# Altium PCB BugBuster_DAQ.PcbDoc (part 3 of 5)
Units mm, origin at the board's own origin, x right, y up, seen from the top; angles counter-clockwise.
Board outline 110 x 80 mm, 6 copper layers (Top Layer, Inner Layer 1, Inner Layer 2, Inner Layer 3, Inner Layer 4, Bottom Layer), stack 1.202 mm thick; 245 components, 205 nets, 1250 pads, 1565 vias.
Unrouted connection lines stored in the file: 8.
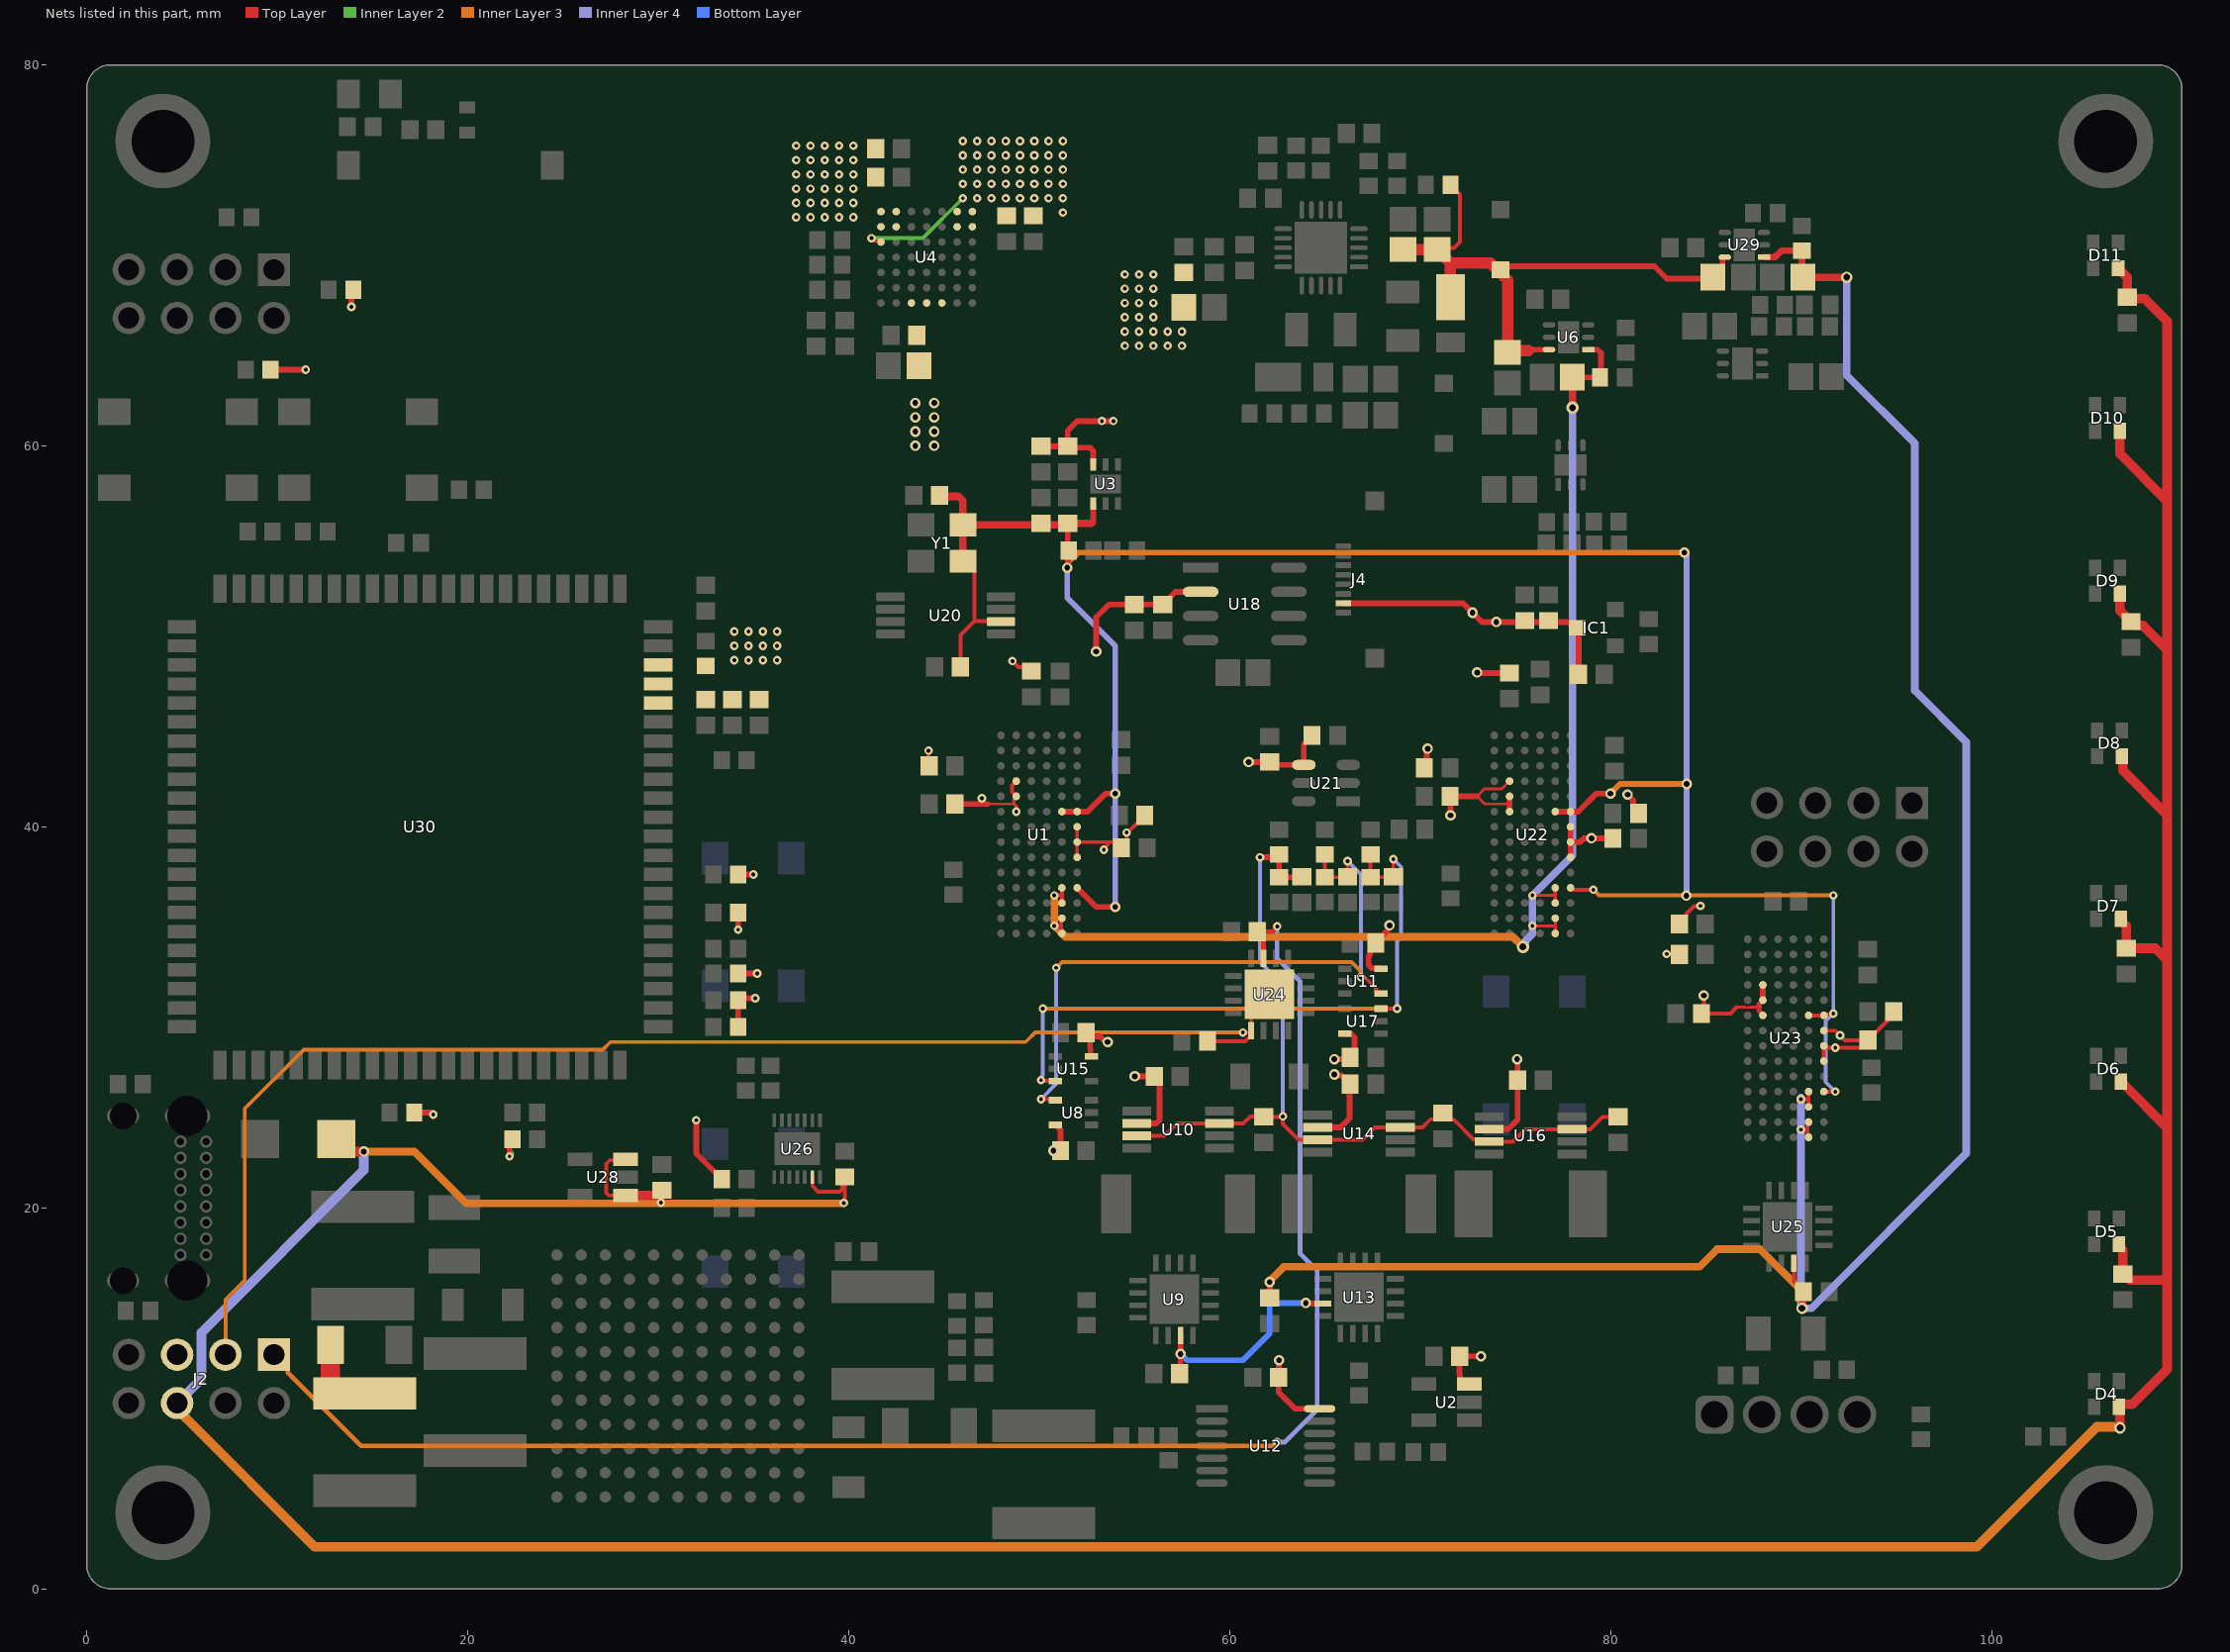
[diagram p6: the nets of this part, all layers, seen from the top]

## Part data (continued)
R52: library part ERJ-3EKF1913V, "RES SMD 191K OHM 1% 1/10W 0603", Device Package="0603 (1608 Metric)", manufacturer="Panasonic Electronic Components", Operating Temperature="-55Â°C ~ 155Â°C", Power (Watts)="0.1W 1/10W", Ratings=AEC-Q200, Supplier Device Package=0603, Supplier Part Number 1=P191KHCT-ND, Temperature Coefficient=Â±100ppm/Â°C, Tolerance=Â±1%, componentlink1description=Datasheet, componentlink1url=https://industrial.panasonic.com/cdbs/www-data/pdf/RDA0000/AOA0000C304.pdf, componentlink2description="DigiKey Link", componentlink2url=https://www.digikey.com/en/products/detail/panasonic-electronic-components/ERJ-3EKF1913V/196180, Composition="Thick Film", Features="Automotive AEC-Q200", Height - Seated (Max)="0.022\ (0.55mm)", lastupdated="2024-02-09 20:42:13.417000", Lifecycle Status=Active, Minimum Order=1, Number of Terminations=2, Package / Case="0603 (1608 Metric)", packaging=TapeAndReel, Part Number=ERJ-3EKF1913V, Part Status=Active, partid=24201, price=0.01, Resistance="191 kOhms", series=ERJ-3EK, Size / Dimension="0.063\ L x 0.031\ W (1.60mm x 0.80mm)", Supplier 1=DigiKey
R53: library part ERJ-8BWFR020V, "RES 0.02 OHM 1% 1W 1206", Device Package="1206 (3216 Metric)", manufacturer="Panasonic Electronic Components", Operating Temperature="-55°C ~ 155°C", Power (Watts)=1W, Ratings=AEC-Q200, Supplier Device Package=1206, Supplier Part Number 1=P.020AUCT-ND, Temperature Coefficient="0/ +150ppm/°C", Tolerance=±1%, componentlink1description=Datasheet, componentlink1url=https://industrial.panasonic.com/cdbs/www-data/pdf/RDN0000/AOA0000C313.pdf, componentlink2description="DigiKey Link", componentlink2url=https://www.digikey.com/en/products/detail/panasonic-electronic-components/ERJ-8BWFR020V/1711639, Composition="Thick Film", Features="Automotive AEC-Q200, Current Sense", Height - Seated (Max)="0.030\" (0.75mm)", lastupdated="05/04/2026 20:25:39", Lifecycle Status=Active, Minimum Order=1, Number of Terminations=2, Package / Case="1206 (3216 Metric)", packaging=TapeAndReel, Part Number=ERJ-8BWFR020V, Part Status=Active, partid=2547, price=0.18, Resistance="20 mOhms", series=ERJ-8BW, Size / Dimension="0.126\" L x 0.063\" W (3.20mm x 1.60mm)", Supplier 1=DigiKey
R55: library part ERJ-D2DFR022V, "RES 0.022 OHM 1W 1206 WIDE", Device Package="1206 (3216 Metric)", manufacturer="Panasonic Electronic Components", Operating Temperature="-55°C ~ 155°C", Power (Watts)=1W, Ratings=AEC-Q200, Supplier Device Package=0612, Supplier Part Number 1=P124357CT-ND, Temperature Coefficient=±100ppm/°C, Tolerance=±1%, componentlink1description=Datasheet, componentlink1url=https://industrial.panasonic.com/cdbs/www-data/pdf/RDN0000/RDN0000C331.pdf, componentlink2description="DigiKey Link", componentlink2url=https://www.digikey.com/en/products/detail/panasonic-electronic-components/ERJ-D2DFR022V/9948175, Composition="Thick Film", Features="Automotive AEC-Q200, Current Sense", Height - Seated (Max)="0.031\" (0.80mm)", lastupdated="05/04/2026 20:25:34", Lifecycle Status=Active, Minimum Order=1, Number of Terminations=2, Package / Case="1206 (3216 Metric)", packaging=TapeAndReel, Part Number=ERJ-D2DFR022V, Part Status=Active, partid=2866, price=0.15, Resistance="22 mOhms", series=ERJ-D2, Size / Dimension="0.063\" L x 0.126\" W (1.60mm x 3.20mm)", Supplier 1=DigiKey
R56: library part ERJ-3EKF9092V, "RES SMD 90.9K OHM 1% 1/10W 0603", Device Package="0603 (1608 Metric)", manufacturer="Panasonic Electronic Components", Operating Temperature="-55°C ~ 155°C", Power (Watts)="0.1W 1/10W", Ratings=AEC-Q200, Supplier Device Package=0603, Supplier Part Number 1=P90.9KHCT-ND, Temperature Coefficient=±100ppm/°C, Tolerance=±1%, componentlink1description=Datasheet, componentlink1url=https://industrial.panasonic.com/cdbs/www-data/pdf/RDA0000/AOA0000C304.pdf, componentlink2description="DigiKey Link", componentlink2url=https://www.digikey.com/en/products/detail/panasonic-electronic-components/ERJ-3EKF9092V/196512, Composition="Thick Film", Features="Automotive AEC-Q200", Height - Seated (Max)="0.022\ (0.55mm)", lastupdated="2024-02-09 20:42:22.497000", Lifecycle Status=Active, Minimum Order=1, Number of Terminations=2, Package / Case="0603 (1608 Metric)", packaging=TapeAndReel, Part Number=ERJ-3EKF9092V, Part Status=Active, partid=23128, price=0.01, Resistance="90.9 kOhms", series=ERJ-3EK, Size / Dimension="0.063\ L x 0.031\ W (1.60mm x 0.80mm)", Supplier 1=DigiKey
R57: library part ERJ-3EKF1132V, "RES SMD 11.3K OHM 1% 1/10W 0603", Device Package="0603 (1608 Metric)", manufacturer="Panasonic Electronic Components", Operating Temperature="-55°C ~ 155°C", Power (Watts)="0.1W 1/10W", Ratings=AEC-Q200, Supplier Device Package=0603, Supplier Part Number 1=P11.3KHCT-ND, Temperature Coefficient=±100ppm/°C, Tolerance=±1%, componentlink1description=Datasheet, componentlink1url=https://industrial.panasonic.com/cdbs/www-data/pdf/RDA0000/AOA0000C304.pdf, componentlink2description="DigiKey Link", componentlink2url=https://www.digikey.com/en/products/detail/panasonic-electronic-components/ERJ-3EKF1132V/196085, Composition="Thick Film", Features="Automotive AEC-Q200", Height - Seated (Max)="0.022\ (0.55mm)", lastupdated="2024-02-09 20:41:56.867000", Lifecycle Status=Active, Minimum Order=1, Number of Terminations=2, Package / Case="0603 (1608 Metric)", packaging=TapeAndReel, Part Number=ERJ-3EKF1132V, Part Status=Active, partid=26019, price=0.01, Resistance="11.3 kOhms", series=ERJ-3EK, Size / Dimension="0.063\ L x 0.031\ W (1.60mm x 0.80mm)", Supplier 1=DigiKey
R58: library part ERJ-3EKF1782V, "RES SMD 17.8K OHM 1% 1/10W 0603", Device Package="0603 (1608 Metric)", manufacturer="Panasonic Electronic Components", Operating Temperature="-55°C ~ 155°C", Power (Watts)="0.1W 1/10W", Ratings=AEC-Q200, Supplier Device Package=0603, Supplier Part Number 1=P17.8KHCT-ND, Temperature Coefficient=±100ppm/°C, Tolerance=±1%, componentlink1description=Datasheet, componentlink1url=https://industrial.panasonic.com/cdbs/www-data/pdf/RDA0000/AOA0000C304.pdf, componentlink2description="DigiKey Link", componentlink2url=https://www.digikey.com/en/products/detail/panasonic-electronic-components/ERJ-3EKF1782V/196161, Composition="Thick Film", Features="Automotive AEC-Q200", Height - Seated (Max)="0.022\ (0.55mm)", lastupdated="2024-02-09 20:42:07.707000", Lifecycle Status=Active, Minimum Order=1, Number of Terminations=2, Package / Case="0603 (1608 Metric)", packaging=TapeAndReel, Part Number=ERJ-3EKF1782V, Part Status=Active, partid=24838, price=0.01, Resistance="17.8 kOhms", series=ERJ-3EK, Size / Dimension="0.063\ L x 0.031\ W (1.60mm x 0.80mm)", Supplier 1=DigiKey
R59: library part ERJ-3EKF1022V, "RES SMD 10.2K OHM 1% 1/10W 0603", Device Package="0603 (1608 Metric)", manufacturer="Panasonic Electronic Components", Operating Temperature="-55°C ~ 155°C", Power (Watts)="0.1W 1/10W", Ratings=AEC-Q200, Supplier Device Package=0603, Supplier Part Number 1=P10.2KHCT-ND, Temperature Coefficient=±100ppm/°C, Tolerance=±1%, componentlink1description=Datasheet, componentlink1url=https://industrial.panasonic.com/cdbs/www-data/pdf/RDA0000/AOA0000C304.pdf, componentlink2description="DigiKey Link", componentlink2url=https://www.digikey.com/en/products/detail/panasonic-electronic-components/ERJ-3EKF1022V/196068, Composition="Thick Film", Features="Automotive AEC-Q200", Height - Seated (Max)="0.022\ (0.55mm)", lastupdated="2024-02-09 20:41:56.830000", Lifecycle Status=Active, Minimum Order=1, Number of Terminations=2, Package / Case="0603 (1608 Metric)", packaging=TapeAndReel, Part Number=ERJ-3EKF1022V, Part Status=Active, partid=26026, price=0.01, Resistance="10.2 kOhms", series=ERJ-3EK, Size / Dimension="0.063\ L x 0.031\ W (1.60mm x 0.80mm)", Supplier 1=DigiKey
R60: library part ERJ-3EKF1053V, "RES SMD 105K OHM 1% 1/10W 0603", Device Package="0603 (1608 Metric)", manufacturer="Panasonic Electronic Components", Operating Temperature="-55°C ~ 155°C", Power (Watts)="0.1W 1/10W", Ratings=AEC-Q200, Supplier Device Package=0603, Supplier Part Number 1=P105KHCT-ND, Temperature Coefficient=±100ppm/°C, Tolerance=±1%, componentlink1description=Datasheet, componentlink1url=https://industrial.panasonic.com/cdbs/www-data/pdf/RDA0000/AOA0000C304.pdf, componentlink2description="DigiKey Link", componentlink2url=https://www.digikey.com/en/products/detail/panasonic-electronic-components/ERJ-3EKF1053V/196079, Composition="Thick Film", Features="Automotive AEC-Q200", Height - Seated (Max)="0.022\ (0.55mm)", lastupdated="2024-02-09 20:42:07.593000", Lifecycle Status=Active, Minimum Order=1, Number of Terminations=2, Package / Case="0603 (1608 Metric)", packaging=TapeAndReel, Part Number=ERJ-3EKF1053V, Part Status=Active, partid=24851, price=0.01, Resistance="105 kOhms", series=ERJ-3EK, Size / Dimension="0.063\ L x 0.031\ W (1.60mm x 0.80mm)", Supplier 1=DigiKey
R61 R64: library part ERJ-PA3F5101V, "RES SMD 5.1K OHM 1% 1/3W 0603", Device Package="0603 (1608 Metric)", manufacturer="Panasonic Electronic Components", Operating Temperature="-55°C ~ 155°C", Power (Watts)="0.333W 1/3W", Ratings=AEC-Q200, Supplier Device Package=0603, Supplier Part Number 1=P5.1KBYCT-ND, Temperature Coefficient=±100ppm/°C, Tolerance=±1%, componentlink1description=Datasheet, componentlink1url=https://industrial.panasonic.com/cdbs/www-data/pdf/RDO0000/AOA0000C331.pdf, componentlink2description="DigiKey Link", componentlink2url=https://www.digikey.com/en/products/detail/panasonic-electronic-components/ERJ-PA3F5101V/5035934, Composition="Thick Film", Features="Automotive AEC-Q200 Pulse Withstanding", Height - Seated (Max)="0.022\ (0.55mm)", lastupdated="2024-02-09 20:42:57.823000", Lifecycle Status=Active, Minimum Order=1, Number of Terminations=2, Package / Case="0603 (1608 Metric)", packaging=TapeAndReel, Part Number=ERJ-PA3F5101V, Part Status=Active, partid=14704, price=0.01, Resistance="5.1 kOhms", series=ERJ-PA3, Size / Dimension="0.063\ L x 0.031\ W (1.60mm x 0.80mm)", Supplier 1=DigiKey
R71 R72 R75: library part ERJ-PA3F1000V, "RES SMD 100 OHM 1% 1/3W 0603", Device Package="0603 (1608 Metric)", manufacturer="Panasonic Electronic Components", Operating Temperature="-55°C ~ 155°C", Power (Watts)="0.333W 1/3W", Ratings=AEC-Q200, Supplier Device Package=0603, Supplier Part Number 1=P100BYCT-ND, Temperature Coefficient=±100ppm/°C, Tolerance=±1%, componentlink1description=Datasheet, componentlink1url=https://industrial.panasonic.com/cdbs/www-data/pdf/RDO0000/AOA0000C331.pdf, componentlink2description="DigiKey Link", componentlink2url=https://www.digikey.com/en/products/detail/panasonic-electronic-components/ERJ-PA3F1000V/5035847, Composition="Thick Film", Features="Automotive AEC-Q200 Pulse Withstanding", Height - Seated (Max)="0.022\ (0.55mm)", lastupdated="2024-02-09 20:42:52.130000", Lifecycle Status=Active, Minimum Order=1, Number of Terminations=2, Package / Case="0603 (1608 Metric)", packaging=TapeAndReel, Part Number=ERJ-PA3F1000V, Part Status=Active, partid=16197, price=0.01, Resistance="100 Ohms", series=ERJ-PA3, Size / Dimension="0.063\ L x 0.031\ W (1.60mm x 0.80mm)", Supplier 1=DigiKey
R77: library part ERJ-3EKF2433V, "RES SMD 243K OHM 1% 1/10W 0603", Device Package="0603 (1608 Metric)", manufacturer="Panasonic Electronic Components", Operating Temperature="-55°C ~ 155°C", Power (Watts)="0.1W 1/10W", Ratings=AEC-Q200, Supplier Device Package=0603, Supplier Part Number 1=P243KHCT-ND, Temperature Coefficient=±100ppm/°C, Tolerance=±1%, componentlink1description=Datasheet, componentlink1url=https://industrial.panasonic.com/cdbs/www-data/pdf/RDA0000/AOA0000C304.pdf, componentlink2description="DigiKey Link", componentlink2url=https://www.digikey.com/en/products/detail/panasonic-electronic-components/ERJ-3EKF2433V/196238, Composition="Thick Film", Features="Automotive AEC-Q200", Height - Seated (Max)="0.022\ (0.55mm)", lastupdated="2024-02-09 20:41:56.083000", Lifecycle Status=Active, Minimum Order=1, Number of Terminations=2, Package / Case="0603 (1608 Metric)", packaging=TapeAndReel, Part Number=ERJ-3EKF2433V, Part Status=Active, partid=26112, price=0.01, Resistance="243 kOhms", series=ERJ-3EK, Size / Dimension="0.063\ L x 0.031\ W (1.60mm x 0.80mm)", Supplier 1=DigiKey
U1 U22 U23: "High Input Impedance, Programmable Gain, 24-Bit, 1MSPS, Alias-Free Î¼ModuleÂ® DAQ Solution", Manufacturer_Name="Analog Devices Inc", Copyright="Copyright (C) 2026 Ultra Librarian. All rights reserved.", Manufacturer_Part_Number=ADAQ7769-1BBCZ, RefDes=RefDes, Type=Type
U2 U28: "+/-0.5 degrees C Accurate, 10-Bit Digital Temperature Sensor, 2.7 to 5.5 V Supply, Industrial, 5-pin SOT23 (RJ-5), Reel", manufacturer="Analog Devices", Supply Voltage Range="2.7 to 5.5 V", Code_JEDEC=MO-178-AA, componentlink1description="Manufacturer URL", componentlink1url=http://www.analog.com/en/index.html, componentlink2description=Datasheet, componentlink2url=http://www.analog.com/static/imported-files/data_sheets/AD7414_7415.pdf, ComponentLink3Description="Package Specification", ComponentLink3URL=http://www.analog.com/static/imported-files/packages/PKG_PDF/SOT-23(RJ)/RJ_5.pdf, ComponentLink4Description="Product URL", ComponentLink4URL=http://www.analog.com/en/mems-sensors/digital-temperature-sensors/ad7415/products/product.html, DatasheetVersion="Rev. F", Mounting Technology="Surface Mount", PackageDescription="5-Pin Small Outline Transistor Package, Body 2.9 x 1.6 mm, Pitch 0.95 mm", PackageReference=RJ-5, PackageVersion="121608-A , 12/2008", Packing=Reel, PartNumber=AD7415ARTZ-0500RL7
U3: "1-A, low-IQ, high-accuracy, adjustable ultra-low-dropout voltage regulator with power good & enable", Package="WSON-6 Texas Instruments", Check_prices=https://www.snapeda.com/parts/TPS74601PDRVT/Texas+Instruments/view-part/?ref=eda, MF="Texas Instruments", MP=TPS74601PDRVT, SnapEDA_Link=https://www.snapeda.com/parts/TPS74601PDRVT/Texas+Instruments/view-part/?ref=snap
U4: library part CMP-09139-000054-1, "DUAL 40VIN, 3A SILENT SWITCR UMO"
U5: library part CMP-09139-000215-1, "IC REG BST SEPIC ADJ DL 20LFCSP", Current - Output 1=2A, Current - Output 2=1.2A, Max Input Voltage=15V, Max Operating Temperature=125°C, Max Output Voltage=39V, Min Input Voltage=2.85V, Min Operating Temperature=-40°C, Min Output Voltage=1.6V, Switching Frequency=2.4MHz, Voltage - Output 2=-39V, Contact Plating=Tin, Lead Free="Contains Lead", Mount="Surface Mount", Number Of Outputs=2, Number of Pins=20, Operating Supply Voltage=15V, Output Current=2A, Output Type=Adjustable, packaging=Tray, REACH SVHC="No SVHC", RoHS Compliant=Yes, Synchronous Rectifier=No, Topology=Boost, Voltage - Output 1=39V
U6 U29: library part CMP-09138-000083-1, "IC REG LIN POS ADJ 200MA 6LFCSP", Dropout Voltage=200mV, Input Bias Current=1uA, Max Input Voltage=40V, Max Operating Temperature=125°C, Max Output Current=200mA, Min Current Limit=250mA, Min Input Voltage=2.7V, Min Operating Temperature=-40°C, Operating Supply Current=180uA, Output Voltage=39.8V, Package Quantity=3000, Power Supply Rejection Ratio (PSRR)=50dB, Quiescent Current=140uA, Accuracy=0.8%, Contact Plating=Gold, Lead Free="Contains Lead", Mount="Surface Mount", Number Of Outputs=1, Number of Pins=6, Number of Regulators=1, Output Current=200mA, Output Type=Adjustable, packaging="Tape and Reel", Polarity=Positive, RoHS Compliant=Yes
U7 U31: library part CMP-09138-000111-1, "IC REG LIN NEG ADJ 200MA 6LFCSP", Dropout Voltage=185mV, Max Input Voltage=-28V, Max Operating Temperature=125°C, Max Output Current=-200mA, Max Output Voltage=-25.3V, Max Supply Current=-650uA, Min Current Limit=230mA, Min Input Voltage=-2.7V, Min Operating Temperature=-40°C, Output Current=200mA, Output Voltage=27.8V, Power Supply Rejection Ratio (PSRR)=45dB, Quiescent Current=-850uA, Accuracy=1%, Contact Plating=Gold, Lead Free="Contains Lead", Min Output Voltage=-2.7V, Mount="Surface Mount", Number Of Outputs=1, Number of Pins=6, Number of Regulators=1, Output Type=Adjustable, packaging="Tape and Reel", Polarity=Negative, RoHS Compliant=Yes
U8 U11 U15 U17: "Rail-to-Rail, Very Fast, 2.5 V to 5.5 V, Single-Supply TTL/CMOS Comparator in 5-lead SC70 and SOT-23 Packages", Manufacturer_Name="Analog Devices Inc", Copyright="Copyright (C) 2026 Ultra Librarian. All rights reserved.", Datasheet=https://www.analog.com/media/en/technical-documentation/data-sheets/ADCMP600_601_602.pdf, Manufacturer_Part_Number=ADCMP600BKSZ-R2, RefDes=RefDes, Type=Type
U9 U13: "0.5 mR RON, ±20 V, +36 V, Quad SPST Switch", Manufacturer_Name="Analog Devices Inc", Copyright="Copyright (C) 2026 Ultra Librarian. All rights reserved.", Manufacturer_Part_Number=ADG6412BCPZ-REEL7, RefDes=RefDes, Type=Interface
U10 U14 U16: "2 V to 70 V Wide Input Voltage Range, 2.7 MHz High Bandwidth, Current-Sense Amplifier with PWM Rejection and Gain 50 V/V", Manufacturer_Name="Analog Devices Inc", Copyright="Copyright (C) 2026 Ultra Librarian. All rights reserved.", Manufacturer_Part_Number=AD8411AWBRMZ, RefDes=RefDes, Type=Linear
U12: library part CMP-04903-000067-1, "IC GATE NOR 4CH 2-INP 14TSSOP"
U18: library part CMP-09137-000153-1, "IC VREF SERIES 0.02% 8SOIC", Case/Package=SOIC, Max Operating Temperature=70°C, Min Operating Temperature=0°C, Min Output Voltage=4.096V, Operating Supply Current=950uA, Output Current=10mA, Temperature Coefficient=1ppm/°C, Tolerance=0.02%, Mount="Surface Mount", Output Type=Fixed, Reference Type=Series, RoHS Compliant=Yes, series=-
U20: library part CMP-04855-000004-1, "IC CLK BUFFER 1:4 250MHZ 8TSSOP", Ambient Temperature Range High=+85°C, Ambient Temperature Range Low=-40°C, manufacturer="Texas Instruments", Max Junction Temp=+125°C, Max Supply Voltage=3.6V, Min Supply Voltage=2.3V, Nominal Supply Current=3-6mA, Package=PW0008A, Temperature="-40°C to +85°C", Automotive=No, Category=IC, componentlink2description=Datasheet, componentlink2url=http://www.ti.com/lit/ds/symlink/cdclvc1104.pdf, Device Class L1="Integrated Circuits (ICs)", Device Class L2="Clock and Timing", Device Class L3="Clock Buffers", Digikey Description="IC CLK BUFFER 1:4 250MHZ 8TSSOP", Height=1.2mm, Lead Free=Yes, Logic Function=Non-Inverting, Manufacturer Part Number=CDCLVC1104PWR, Mouser Description="Clock Buffer Lo Jitter,1:4 LVCMOS Fan-out Clock Buffer", Number of Elements=1, Number of Inputs=1, Number Of Outputs=4, Octopart=https://octopart.com/cdclvc1104pwr-texas+instruments-18629864, Propagation Delay=2ns, RoHS=TRUE, Standoff Height=0.05mm, Temperature Range High=+85°C, Temperature Range Low=-40°C
U21: library part CMP-09137-000009-1, "IC VREF SERIES 0.1% TSOT23-6", Case/Package=SOT-23-6, Max Input Voltage=18V, Max Operating Temperature=70°C, Max Output Voltage=5V, Min Input Voltage=5.5V, Min Operating Temperature=0°C, Output Current=5mA, Package Quantity=1, Quiescent Current=1uA, Temperature Coefficient=20ppm/°C, Tolerance=0.1%, Mount="Surface Mount", Number Of Channels=1, Number of Pins=6, Output Voltage=5V, packaging="Cut Tape", REACH SVHC="No SVHC", Reference Type=Series, Reference Voltage=5V, RoHS Compliant=Yes, series=-
U24 U25: "High Voltage, Latch-up Proof, 4-Channel Multiplexer", Manufacturer_Name="Analog Devices Inc", Copyright="Copyright (C) 2026 Ultra Librarian. All rights reserved.", Datasheet=https://www.analog.com/media/en/technical-documentation/data-sheets/ADG5204.pdf, Manufacturer_Part_Number=ADG5204BCPZ-RL7, RefDes=RefDes, Type=Type
U26: library part DS4424, "Two-/Four-Channel, IÂ²C, 7-Bit Sink/Source Current DAC", Manufacturer_Name="Analog Devices Inc", Manufacturer_Part_Number=ds4424n+, Copyright="Copyright (C) 2026 Ultra Librarian. All rights reserved.", RefDes=RefDes, Type=Type
U27: "DC DC CONVERTER 1.2-48V", Case/Package=BGA, Max Input Voltage=58V, Max Operating Temperature=125°C, Max Output Current=4A, Max Output Voltage=48V, Min Input Voltage=5V, Min Operating Temperature=-55°C, Min Output Voltage=1.2V, Switching Frequency=800kHz, Features=OTP, Height=0.2inch, Length=0.59inch, Mount="Surface Mount", Number Of Outputs=1, Number of Pins=121, Output Current=4A, Output Voltage=1.2V, packaging=Tray, REACH SVHC="No SVHC", RoHS Compliant=Yes, Topology=Buck-Boost, Voltage - Output 1=48V, Width=0.59inch
U30: "Dual-core RISC-V high-performance module", Package=None, Check_prices=https://www.snapeda.com/parts/ESP32-P4%20Module/Waveshare+Electronics/view-part/?ref=eda, MF="Waveshare Electronics", MP="ESP32-P4 Module", SnapEDA_Link=https://www.snapeda.com/parts/ESP32-P4%20Module/Waveshare+Electronics/view-part/?ref=snap
Y1: library part CMP-25159-264590-1, Case/Package=SMD/SMT, Frequency=16.384000MHz, Frequency Stability=10ppm, Max Operating Temperature=85°C, Max Supply Current=33mA, Min Operating Temperature=-40°C, Mount="Surface Mount", packaging="Tape and Reel", RoHS Compliant=Yes, series=SIT8208

## Free pads (board coordinates)
  round 5 hole 3.3 mask+0: 1(4,76) 2(4,4) 3(106,4) 4(106,76)

## Via types
v1: diameter 0.55, hole 0.25, Top Layer to Bottom Layer, tented both sides, 1062 vias
v2: diameter 0.45, hole 0.2, Top Layer to Bottom Layer, tented both sides, 408 vias
v3: diameter 0.55, hole 0.3, Top Layer to Bottom Layer, tented both sides, 78 vias
v4: diameter 0.6, hole 0.35, Top Layer to Bottom Layer, tented both sides, 9 vias
v5: diameter 0.5, hole 0.2, Top Layer to Bottom Layer, tented both sides, 6 vias
v6: diameter 0.65, hole 0.35, Top Layer to Bottom Layer, tented both sides, 2 vias

## Nets (pads, with @x,y where several pads share a name; then routed paths per layer and width w, separated by ;. In a path a pad name is that pad's centre, name@x,y a point inside that pad or via, vN(x,y) a via of type N, cw(c..) or ccw(c..) an arc to the next point about the centre after c; other vN are vias at no path point)
3V3: C6.2 C32.2 C40.2 C62.2 R7.2 U1.E9 U1.F4 U1.F9 U3.1 U20.6 U22.E9 U22.F4 U22.F9 U23.E9 U23.F4 U23.F9 Y1.1 Y1.4 | length 133.6
  Top Layer w0.2: C40.2@45.025,57.1 C40.2@45.125,57 ; Y1.1@45.542,56.308 Y1.1@46,55.85 ; C32.2@45.875,48.4 45.875,50.075 46.6,50.8 ; Y1.4@46,53.95 46.1,53.95 46.6,53.45 46.6,50.8 ; U20.6@48,50.775 47.975,50.8 46.6,50.8 ; U22.F4@77.9,36.8 77.956,36.8 78.056,36.7 v2(79.1,36.7) ; U23.E9@90.4,30.1 U23.F9@91.2,30.1 91.239,30.139 91.385,30.139 91.402,30.156 91.656,30.156 v2(91.7,30.2) ; U23.F4@91.2,26.1 v2(91.8,26.1)
  Top Layer w0.3: U1.E9@51.2,40.8 U1.F9@52,40.8 52.55,40.8 53.5,41.75 v3(54,41.75) ; v3(51.475,53.6) 51.513,53.638 51.513,54.463 R7.2@51.55,54.5 51.5,54.55 C6.2@51.5,55.925 ; U1.F4@52,36.8 53,35.8 v3(54,35.8) ; 52.8,56 52.85,56.05 U3.1@52.85,56.975 ; U22.E9@77.1,40.8 U22.F9@77.9,40.8 78.3,40.8 79.25,41.75 v3(80,41.75)
  Top Layer w0.4: C40.2@44.775,57.4 C40.2@44.775,57.35 ; C40.2@45.025,57.1 C40.2@44.775,57.35 ; Y1.1@45.5,56.25 45.9,55.85 Y1.1@46,55.85 ; Y1.4@46,53.95 Y1.1@46,55.85 ; 52.8,56 52.725,55.925 C6.2@51.5,55.925 51.425,55.85 Y1.1@46,55.85 ; C40.2@44.775,57.35 45.766,57.35 46,57.116 Y1.1@46,55.85
  Inner Layer 3 w0.2: v2(79.1,36.7) 79.4,36.4 v2(91.7,36.4)
  Inner Layer 3 w0.3: v3(51.475,53.6) 51.523,53.648 51.523,53.873 52.05,54.4 v3(83.875,54.4) ; v3(80,41.75) 80.5,42.25 v3(84,42.25)
  Inner Layer 4 w0.2: v2(91.7,36.4) v2(91.7,30.2) 91.3,29.8 91.3,26.6 v2(91.8,26.1)
  Inner Layer 4 w0.3: v3(51.475,53.6) 51.475,52.025 54,49.5 v3(54,41.75) v3(54,35.8) ; v3(83.875,54.4) 83.875,54.332 84,54.207 84,36.399 v3(83.986,36.385)
3V3_ESP: C72.2 C76.2 C79.2 C80.2 C81.2 C83.2 C84.2 C90.2 IC1.3 J4.2 R4.2 R43.2 R44.2 R46.2 R51.2 R58.2 R67.1 R68.2 R69.2 R74.2 R76.2 U4.F6 U4.F7 U4.G6 U4.G7 U30.84 U30.85 U30.86 | length 29
  Top Layer w0.3: R76.2@9.65,64 v2(11.5,64) ; v2(13.9,67.3) 13.9,68.1 cw(c14,68.1) R67.1@14,68.2 ; R46.2@17.2,25 18.059,25 18.159,24.9 v2(18.2,24.9) ; v2(22.2,22.7) 22.2,23.45 R4.2@22.35,23.6 ; v2(32,24.6) 32,22.85 33.025,21.825 33.075,21.825 33.35,21.55 R58.2@33.35,21.5 ; R68.2@34.2,29.5 R69.2@34.2,30.9 34.3,31 v2(35.1,31) ; R51.2@34.2,32.3 v2(35.2,32.3) ; v2(34.2,34.6) R44.2@34.2,35.5 ; R43.2@34.2,37.5 v2(35,37.5) ; J4.2@65.985,51.734 72.266,51.734 73.25,50.75 77.774,50.75 77.824,50.7 78,50.7 IC1.3@78.25,50.45 78.325,50.375 C81.2@78.325,48
  Inner Layer 2 w0.3: v2(22.2,22.7) 22.2,22.741 v2@22.3,22.841
  other v2: 34,48.75 34.75,48.75 35.5,48.75 36.25,48.75 34,49.5 34.75,49.5 35.5,49.5 36.25,49.5 34,50.25 34.75,50.25 35.5,50.25 36.25,50.25 37.25,72 38,72 38.75,72 39.5,72 40.25,72 37.25,72.75 38,72.75 38.75,72.75 39.5,72.75 40.25,72.75 37.25,73.5 38,73.5 38.75,73.5 39.5,73.5 40.25,73.5 37.25,74.25 38,74.25 38.75,74.25 39.5,74.25 40.25,74.25 37.25,75 38,75 38.75,75 39.5,75 40.25,75 37.25,75.75 38,75.75 38.75,75.75 39.5,75.75 40.25,75.75
  other v3: 74,50.75 72.758,51.242
3V9: C11.2 R32.1 R35.2 U8.4 U11.4 | length 35.8
  Top Layer w0.2: v2(50.1,25.7) 50.8,25.7 U8.4@50.85,25.65 ; R32.1@65,38.55 R35.2@65,37.35 66.175,37.35 C11.2@66.2,37.375 v2(66.2,38.2) ; v2(66.9,32.1) 66.948,32.052 67.148,32.052 67.7,31.5 67.7,31.325 67.775,31.25 U11.4@67.95,31.25
  Inner Layer 3 w0.2: v2(50.9,32.6) 51.2,32.9 66.4,32.9 66.879,32.421 66.879,32.121 v2(66.9,32.1)
  Inner Layer 4 w0.2: v2(50.1,25.7) 50.9,26.5 v2(50.9,32.6) ; v2(66.2,38.2) 66.9,37.5 v2(66.9,32.1)
5V3_BUCK: C4.2 C5.2 C8.2 C9.2 C12.2 C22.2 C23.2 C28.2 C29.2 C37.2 C38.2 C39.2 C41.2 C42.2 C44.2 C55.2 C56.2 C57.2 C61.2 FB4.1 U1.B9 U1.B10 U1.B11 U2.3 U3.6 U4.E7 U4.F1 U4.F2 U4.G1 U4.G2 U8.5 U10.6 U11.5 U12.14 U14.6 U15.5 U16.6 U17.5 U21.4 U22.B9 U22.B10 U22.B11 U23.B9 U23.B10 U23.B11 | length 68.1
  Top Layer w0.15: 47.3,41.2 48.675,41.2 48.797,41.078 ; 74.7,41.2 73.4,41.2 73,41.6 73.4,42 74.3,42 U22.B11@74.7,42.4 ; 86.625,30.525 87.038,30.525 87.043,30.52 87.357,30.52 87.362,30.525 87.8,30.525
  Top Layer w0.2: v2(41.2,70.9) 41.268,70.9 41.429,70.738 41.662,70.738 U4.E7@41.7,70.7 ; 47,41.2 v2(47,41.5) ; 48.675,41.2 48.675,41.419 48.8,41.544 U1.B10@48.8,41.6 48.577,41.823 48.577,42.177 U1.B11@48.8,42.4 ; v2(48.8,40.8) 48.8,41.078 ; v3(84.9,31.146) 84.9,30.325 C57.2@84.775,30.2 86.3,30.2 86.625,30.525
  Top Layer w0.25: 87.8,30.525 87.8,30.329 U23.B9@88,30.129 ; 87.8,30.671 U23.B10@88,30.871
  Top Layer w0.3: C55.2@45.575,41.2 47,41.2 47.3,41.2 ; C5.2@50.1,59.975 C61.2@51.5,59.975 ; v3(50.752,23) C22.2@51.125,23 51.125,24.075 51.05,24.15 51.05,24.325 51.025,24.35 U8.5@50.85,24.35 ; U15.5@52.75,27.95 52.726,27.95 52.701,27.975 52.701,28.399 52.674,28.426 C38.2@52.674,29.001 ; U3.6@52.85,59.025 52.85,59.724 52.674,59.9 51.575,59.9 C61.2@51.5,59.975 ; v3(53.6,28.7) 53.5,28.7 53.199,29.001 C38.2@52.674,29.001 ; v2(53.9,61.3) 52,61.3 51.5,60.8 C61.2@51.5,59.975 ; v3(55.025,26.9) C23.2@56.05,26.9 ; U10.6@55.128,24.425 55.134,24.431 56.149,24.431 56.325,24.607 C23.2@56.325,26.859 ; v3(61,43.4) C9.2@62.1,43.4 62.25,43.25 U21.4@63.9,43.25 63.9,44.325 64.325,44.75 C41.2@64.325,44.8 ; v3(62.6,12) 62.58,11.98 62.58,11.105 C37.2@62.575,11.1 62.575,10.325 63.45,9.45 U12.14@64.725,9.45 ; U14.6@64.628,24.225 65.825,24.225 66.3,24.7 66.3,26.475 C29.2@66.325,26.5 66.325,26.55 66.025,26.85 65.975,26.85 65.873,26.952 65.548,26.952 v3(65.5,27) ; v3(65.5,27.8) 66.225,27.8 66.556,28.131 66.556,28.949 66.38,29.125 66.075,29.125 U17.5@66.05,29.15 ; U11.5@67.95,32.55 67.925,32.575 67.476,32.575 67.3,32.751 67.3,33.2 67.375,33.275 67.375,33.6 C28.2@67.675,33.9 67.675,33.95 68.352,34.627 68.352,34.779 v3(68.4,34.827) ; v3(71.6,40.602) 71.6,41.575 C56.2@71.575,41.6 73,41.6 ; U2.3@72.6,10.75 72.3,10.75 72.1,10.95 72.1,11.25 72.075,11.275 C4.2@72.075,12.2 v3(73.2,12.2) ; U16.6@73.628,24.125 73.643,24.14 74.64,24.14 75.125,24.625 C39.2@75.125,26.7 75.125,27.775 v3(75.1,27.8) ; U22.B9@74.7,40.8 74.7,41.2 U22.B10@74.7,41.6 ; 87.8,30.525 87.8,30.671 ; U23.B9@88,30.1 U23.B9@88,30.129 ; U23.B10@88,30.871 U23.B11@88,31.7 ; C38.2@52.674,29.001 C38.2@52.475,29.2 C38.2@52.674,29.001
  Inner Layer 2 w0.2: v2(41.2,70.9) 43.9,70.9 v2(46,73)
  other v2: 53.3,61.3 54.5,65.25 55.25,65.25 56,65.25 56.75,65.25 57.5,65.25 54.5,66 55.25,66 56,66 56.75,66 57.5,66 54.5,66.75 55.25,66.75 56,66.75 54.5,67.5 55.25,67.5 56,67.5 54.5,68.25 55.25,68.25 56,68.25 54.5,69 55.25,69 56,69 51.25,72.25 46.75,73 47.5,73 48.25,73 49,73 49.75,73 50.5,73 51.25,73 46,73.75 46.75,73.75 47.5,73.75 48.25,73.75 49,73.75 49.75,73.75 50.5,73.75 51.25,73.75 46,74.5 46.75,74.5 47.5,74.5 48.25,74.5 49,74.5 49.75,74.5 50.5,74.5 51.25,74.5 46,75.25 46.75,75.25 47.5,75.25 48.25,75.25 49,75.25 49.75,75.25 50.5,75.25 51.25,75.25 46,76 46.75,76 47.5,76 48.25,76 49,76 49.75,76 50.5,76 51.25,76
5V_BUCK: C63.2 C74.2 C82.2 C87.2 C88.2 C89.2 D3.1 D4.4 D5.4 D6.4 D7.4 D8.4 D9.4 D10.4 D11.4 J2.6 U26.13 U28.1 U28.3 | length 252.8
  Top Layer w0.2: U28.1@28.3,20.65 27.4,20.65 27.275,20.775 27.275,22.3 27.467,22.492 28.242,22.492 U28.3@28.3,22.55 ; U26.13@38.1,21.601 38.102,21.6 38.102,21.148 38.4,20.85 39.525,20.85 39.667,20.992 39.667,21.492 C74.2@39.8,21.625 39.8,20.368 39.75,20.318 v2(39.75,20.25)
  Top Layer w0.4: v2(30.15,20.275) 30.16,20.285 30.16,20.885 C63.2@30.2,20.925
  Top Layer w0.5: D3.1@13.1,23.6 13.75,22.95 v3(14.55,22.95) ; U28.1@28.3,20.65 29.875,20.65 30.15,20.925 C63.2@30.2,20.925 ; D11.4@106.65,69.325 106.65,69.225 106.725,69.15 106.825,69.15 107.125,68.85 C82.2@107.125,67.8 107.205,67.72 108.055,67.72 109.225,66.55 109.225,57.175 ; D5.4@106.7,18.089 106.7,17.989 106.9,17.789 C87.2@106.9,16.525 106.95,16.525 107.275,16.2 109.225,16.2 ; v4(106.75,8.45) 106.75,9.5 D4.4@106.7,9.55 106.7,9.605 106.775,9.68 107.38,9.68 109.225,11.525 109.225,16.2 ; D9.4@106.75,52.246 106.75,51.35 107.075,51.025 107.075,50.975 107.275,50.775 C89.2@107.325,50.775 107.525,50.575 107.95,50.575 109.225,49.3 ; D10.4@106.75,60.786 106.75,59.575 109.15,57.175 109.225,57.175 ; D6.4@106.8,26.629 106.8,26.529 106.875,26.454 106.975,26.454 109.225,24.204 ; D7.4@106.8,35.168 106.8,35.068 107.075,34.793 C88.2@107.075,33.625 108.6,33.625 109.225,33 ; D8.4@106.85,43.707 106.902,43.655 106.902,42.948 109.225,40.625 ; 109.225,16.2 109.225,24.204 ; 109.225,24.204 109.225,33 ; 109.225,33 109.225,40.625 ; 109.225,40.625 109.225,49.3 ; 109.225,49.3 109.225,57.175
  Top Layer w1: J2.6@4.75,9.75 J2.6@4.884,9.616
  Inner Layer 3 w0.4: v3(14.55,22.95) 17.2,22.95 19.925,20.225 v2@39.75,20.225
  Inner Layer 3 w0.5: J2.6@4.75,9.75 4.75,9.425 5.219,8.956 11.975,2.2 99.225,2.2 105.525,8.5 v4@106.673,8.5 ; v4@106.673,8.5 106.7,8.5 v4(106.75,8.45) 106.723,8.45 v4@106.673,8.5
  Inner Layer 4 w0.5: J2.6@4.75,9.75 5.975,10.975 5.975,11.025 6.025,11.075 6.025,13.45 14.55,21.975 v3(14.55,22.95)
5V_LDO: C26.2 C35.2 C58.2 FB1.1 FB2.1 FB3.1 U1.F6 U1.F7 U1.F8 U18.2 | length 16.6
  Top Layer w0.2: v2(44.2,44) 44.2,43.225 FB1.1@44.225,43.2 ; v2(48.6,48.7) 48.917,48.383 49.392,48.383 FB3.1@49.6,48.175 ; U1.F6@52,38.4 U1.F7@52,39.2 ; U1.F8@52,40 U1.F7@52,39.2 ; v2(53.4,38.8) 53.4,38.842 53.6,39.042 53.6,39.2 ; FB2.1@55.55,40.6 55.55,40.55 55.2,40.2 55.15,40.2 54.65,39.7 v2(54.6,39.7) 54.6,39.175 C58.2@54.325,38.9 54.025,39.2 53.6,39.2 ; U1.F7@52,39.2 53.6,39.2
  Top Layer w0.3: v3(53,49.2) 53,51 53.675,51.675 C35.2@55,51.675 C26.2@56.5,51.675 ; C26.2@56.55,51.675 56.85,51.975 56.85,52.025 57.16,52.335 U18.2@58.484,52.335
5V_LDO1: C59.2 FB5.1 FB7.1 FB9.1 U22.F6 U22.F7 U22.F8 | length 8
  Top Layer w0.3: FB5.1@70.225,43.1 70.351,43.226 70.351,43.983 70.4,44.032 v3(70.4,44.1) ; v3(73,48.1) 73.025,48.075 FB9.1@74.7,48.075 ; U22.F6@77.9,38.4 U22.F7@77.9,39.2 ; U22.F8@77.9,40 U22.F7@77.9,39.2 ; v3(79,39.4) v3@78.9,39.4 ; C59.2@80.125,39.4 v3@78.9,39.4 ; v3(80.9,41.698) 80.9,41.687 81.188,41.399 81.188,40.987 FB7.1@81.475,40.7 ; U22.F7@77.9,39.2 78.4,39.2 78.6,39.4 v3@78.9,39.4
5V_LDO2: C60.2 FB6.1 FB8.1 FB10.1 U23.F6 U23.F7 U23.F8 | length 10.2
  Top Layer w0.2: v2(82.95,33.325) 83.6,33.325 FB6.1@83.625,33.3 ; FB10.1@83.625,34.9 83.975,35.25 83.975,35.425 84.391,35.841 84.716,35.841 v2(84.725,35.85) ; U23.F6@91.2,27.7 U23.F7@91.2,28.5 91.256,28.5 91.356,28.4 93.175,28.4 93.525,28.75 C60.2@93.525,28.8 92.3,28.8 v2(92.05,29.05) 91.8,29.3 U23.F8@91.2,29.3 ; C60.2@93.525,28.85 93.875,29.2 93.925,29.2 94.525,29.8 94.525,29.95 FB8.1@94.875,30.3
  other v2: 91.8,28.4
15V_LDO: C45.2 R17.2 U1.E1 U1.E2 U1.E3 U1.E4 U6.1 U22.E1 U22.E2 U22.E3 U22.E4 | length 67.6
  Top Layer w0.15: v2(75.9,34.8) 77.1,34.8 ; v2(75.9,36.4) 77.1,36.4 ; U22.E1@77.1,34.4 77.1,34.8 ; U22.E2@77.1,35.2 77.1,34.8
  Top Layer w0.2: v2(50.8,34.8) 51.148,34.8 ; v2(50.8,36.4) 51.2,36.4 ; U1.E1@51.2,34.4 51.161,34.439 51.161,34.6 51.148,34.613 51.148,34.8 ; U1.E2@51.2,35.2 51.161,35.161 51.161,35 51.148,34.987 51.148,34.8 ; U1.E3@51.2,36 51.2,36.4 ; U1.E4@51.2,36.8 51.2,36.4 ; U22.E3@77.1,36 77.1,36.4 U22.E4@77.1,36.8
  Top Layer w0.3: C45.2@78,63.6 R17.2@79.45,63.6 79.5,63.65 79.5,64.874 79.324,65.05 U6.1@78.828,65.05
  Top Layer w0.4: v6(78,62) C45.2@78,63.6
  Inner Layer 3 w0.4: v2(50.8,36.4) v2(50.8,34.8) 50.814,34.8 51.389,34.225 74.875,34.225 v6(75.4,33.7)
  Inner Layer 4 w0.4: v6@75.448,33.652 v6(75.4,33.7) 75.4,33.768 75.525,33.893 75.525,34.002 75.9,34.377 v2(75.9,34.8) v2(75.9,36.4) 78,38.5 v6(78,62)
20V_USB: C64.2 C65.2 C73.2 FB11.1 J2.5 U4.A3 U4.A4 U4.A5 | length 4.3
  Top Layer w1: FB11.1@12.8,12.8 12.8,10.45 ccw(c13,10.45) 13,10.25 C65.2@14.6,10.25
  other v3: 43.5,60 44.5,60 43.5,60.75 44.5,60.75 43.5,61.5 44.5,61.5 43.5,62.25 44.5,62.25
24V_LDO: C24.2 C30.2 C33.2 C92.2 R52.1 U9.11 U13.11 U23.E1 U23.E2 U23.E3 U23.E4 U25.11 U29.1 | length 126.9
  Top Layer w0.2: U25.11@89.625,17.098 89.625,16.117 89.742,16 89.775,16 90.125,15.65 C33.2@90.125,15.6 ; v2(90,24.1) 90.348,24.1 ; v2(90,25.7) 90.4,25.7 ; U23.E1@90.4,23.7 90.4,23.756 90.452,23.807 90.452,23.809 90.348,23.913 90.348,24.1 ; U23.E2@90.4,24.5 90.4,24.444 90.452,24.393 90.452,24.391 90.348,24.287 90.348,24.1 ; U23.E3@90.4,25.3 90.4,25.7 ; U23.E4@90.4,26.1 90.4,25.7
  Top Layer w0.3: C24.2@57.375,11.3 57.425,11.35 v3(57.425,12.324) U9.11@57.425,13.298 ; C30.2@62.1,15.275 v3(62.1,16.1) ; v3(64,15) 64.025,14.975 U13.11@64.898,14.975
  Top Layer w0.344: U29.1@88.053,69.9 88.625,69.9 88.975,70.25 R52.1@90.05,70.25 90.05,68.9 C92.2@90.1,68.85
  Top Layer w0.4: v4(90.05,14.727) 90.087,14.764 90.087,15.562 C33.2@90.125,15.6 ; C92.2@90.1,68.85 v4(92.4,68.85)
  Inner Layer 3 w0.4: v3(62.1,16.1) 62.1,16.141 62.175,16.216 62.175,16.225 62.85,16.9 84.675,16.9 85.6,17.825 87.85,17.825 90.05,15.625 v4(90.05,14.727)
  Inner Layer 4 w0.4: v2@90,25.775 v2(90,24.1) 90,14.918 90.012,14.907 90.012,14.765 v4(90.05,14.727) 90.552,14.727 98.675,22.85 98.675,44.45 95.975,47.15 95.975,60.125 92.4,63.7 v4(92.4,68.85)
  Bottom Layer w0.3: v3(57.425,12.324) 57.452,12.324 57.776,12 60.7,12 62.1,13.4 62.1,15 ; v3(62.1,16.1) 62.1,15 ; v3(64,15) 62.1,15
26V_BOOST: C15.2 C16.2 C46.2 C93.2 D1.1 D12.2 R12.1 U6.6 U29.6 | length 31.6
  Top Layer w0.2: C15.2@70.9,70.3 70.983,70.383 71.783,70.383 72.1,70.7 72.1,73.2 71.975,73.325 71.925,73.325 71.6,73.65 R12.1@71.6,73.7
  Top Layer w0.3: D12.2@74.15,69.15 74.425,69.15 74.7,69.425 82.3,69.425 82.95,68.775 85.3,68.775 C93.2@85.375,68.85 85.875,69.35 85.875,69.896 85.879,69.9 U29.6@85.997,69.9 ; 75.7,65 75.75,65.05 U6.6@76.772,65.05
  Top Layer w0.6: C16.2@69.1,70.3 C15.2@70.9,70.3 70.95,70.3 71.3,69.95 71.3,69.9 71.6,69.6 ; D1.1@71.6,67.8 71.6,69.6 ; 75.7,65 74.7,65 C46.2@74.6,64.9 74.6,68.7 74.15,69.15 73.7,69.6 71.6,69.6
250mV: C10.2 C27.1 C36.1 C43.1 R31.1 R34.2 U10.3 U10.7 U14.3 U14.7 U16.3 U16.7 | length 45.8
  Top Layer w0.2: U10.7@55.128,23.775 56.575,23.775 57.225,24.425 U10.3@59.472,24.425 60.725,24.425 61.1,24.8 61.775,24.8 C27.1@61.8,24.775 62.775,24.775 v2(62.8,24.8) 62.8,24.4 63.625,23.575 U14.7@64.628,23.575 66.975,23.575 67.625,24.225 U14.3@68.972,24.225 70.125,24.225 70.55,24.65 70.875,24.65 C36.1@71.2,24.975 71.55,24.625 71.775,24.625 72.796,23.604 73.5,23.604 U16.7@73.628,23.475 74.875,23.475 75.525,24.125 U16.3@77.972,24.125 78.925,24.125 79.575,24.775 C43.1@80.4,24.775
  Top Layer w0.3: v2(61.6,38.4) 62.45,38.4 R31.1@62.6,38.55 R34.2@62.6,37.35 63.775,37.35 C10.2@63.8,37.375
  Inner Layer 4 w0.2: v2(61.6,38.4) 61.6,32.9 62.8,31.7 v2(62.8,24.8)
325mV: C21.2 R33.1 R36.2 U15.3 U17.3 | length 35.5
  Top Layer w0.2: v2(50.1,26.7) 50.14,26.66 50.84,26.66 U15.3@50.85,26.65 ; R33.1@67.4,38.55 R36.2@67.4,37.35 68.575,37.35 C21.2@68.6,37.375 v2(68.6,38.3) ; U17.3@67.95,30.45 67.952,30.452 68.798,30.452 v2(68.8,30.454)
  Inner Layer 3 w0.2: v2(50.2,30.454) 52.307,30.454 52.313,30.448 52.687,30.448 52.693,30.454 65.007,30.454 65.013,30.448 65.387,30.448 65.393,30.454 v2(68.8,30.454)
  Inner Layer 4 w0.2: v2(50.1,26.7) 50.148,26.748 50.148,26.89 50.2,26.942 v2(50.2,30.454) ; v2(68.6,38.3) 69,37.9 69,34.192 68.8,33.992 v2(68.8,30.454)
+15V_ANA: C25.2 J2.1 U24.11 | length 86.6
  Top Layer w0.25: U24.11@61.775,33.102 61.775,34.175 C25.2@61.45,34.5 62.261,34.5 62.5,34.739 v2(62.5,34.777)
  Inner Layer 3 w0.25: J2.1@9.83,12.29 10.555,11.565 10.555,11.345 14.4,7.5 62.254,7.5 62.454,7.7 v2(62.5,7.7)
  Inner Layer 4 w0.25: v2(62.5,7.7) 62.9,7.7 64.6,9.4 64.6,16.7 63.7,17.6 63.7,31.9 62.5,33.1 v2(62.5,34.777)
-15V_ANA: C31.2 J2.3 U24.1 U24.17 | length 72.4
  Top Layer w0.15: v2(60.7,29.2) U24.1@61.05,29.2 ; U24.1@61.125,29.298 61.125,30.225 U24.17@62.1,31.2
  Top Layer w0.2: C31.2@58.842,28.75 60.814,28.75 U24.1@61.051,28.988
  Inner Layer 3 w0.2: J2.3@7.29,12.29 7.29,15.19 8.3,16.2 8.3,25.2 11.4,28.3 27.1,28.3 27.5,28.7 49.3,28.7 49.8,29.2 51.803,29.2 51.805,29.202 53.808,29.202 53.81,29.2 v2(60.7,29.2)